# EAGLE board Extrudrboard2 (EAGLE 6.2)
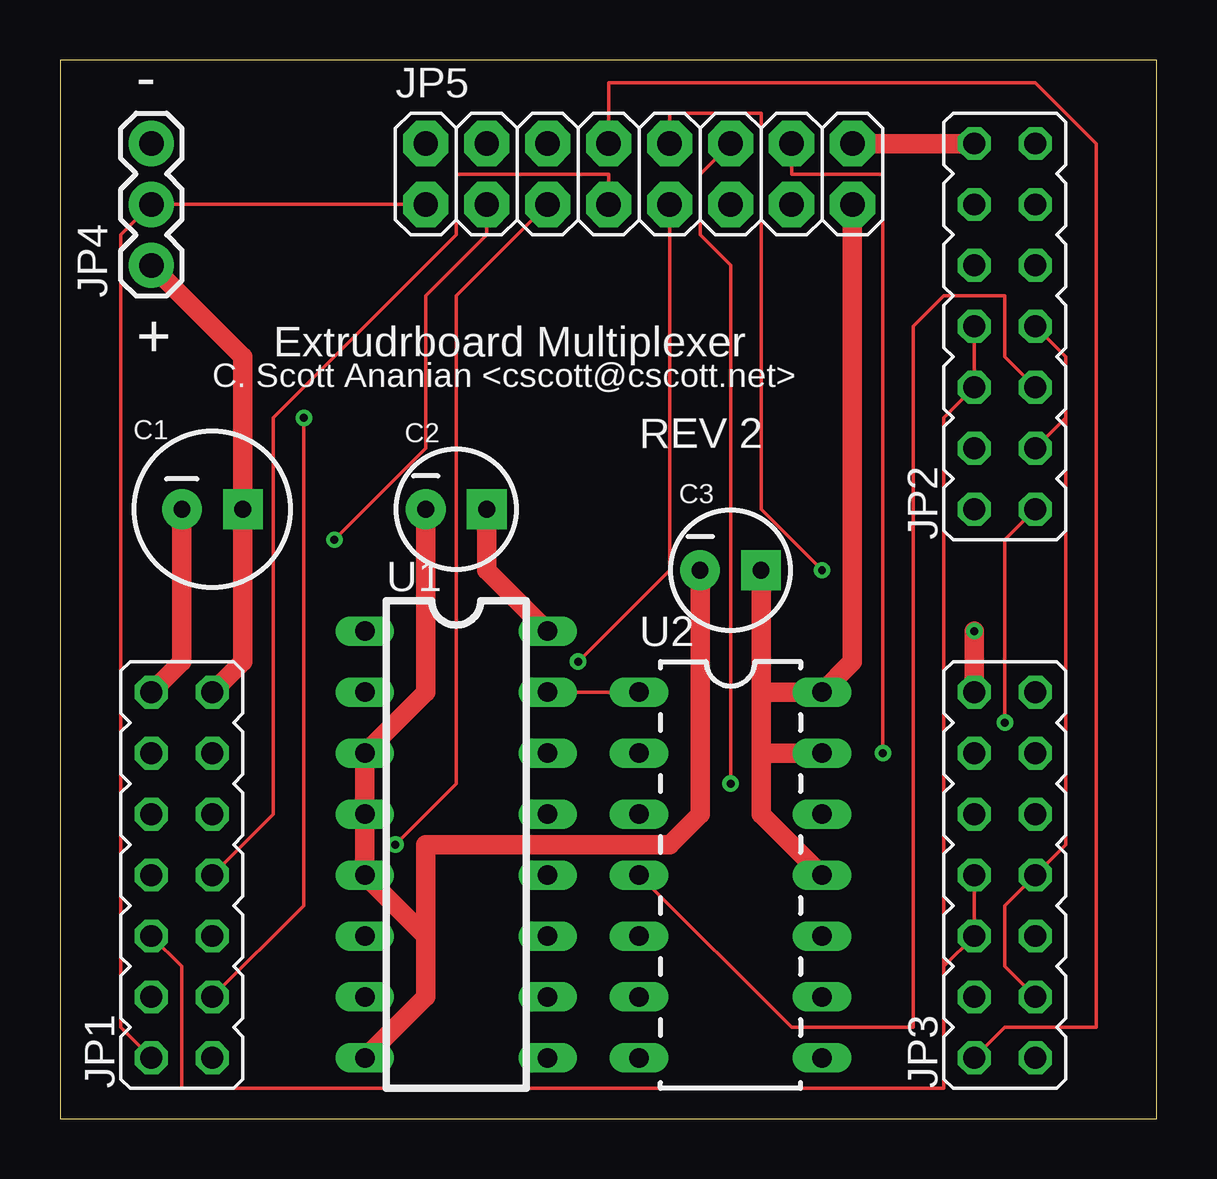
[diagram p0: board, top side]
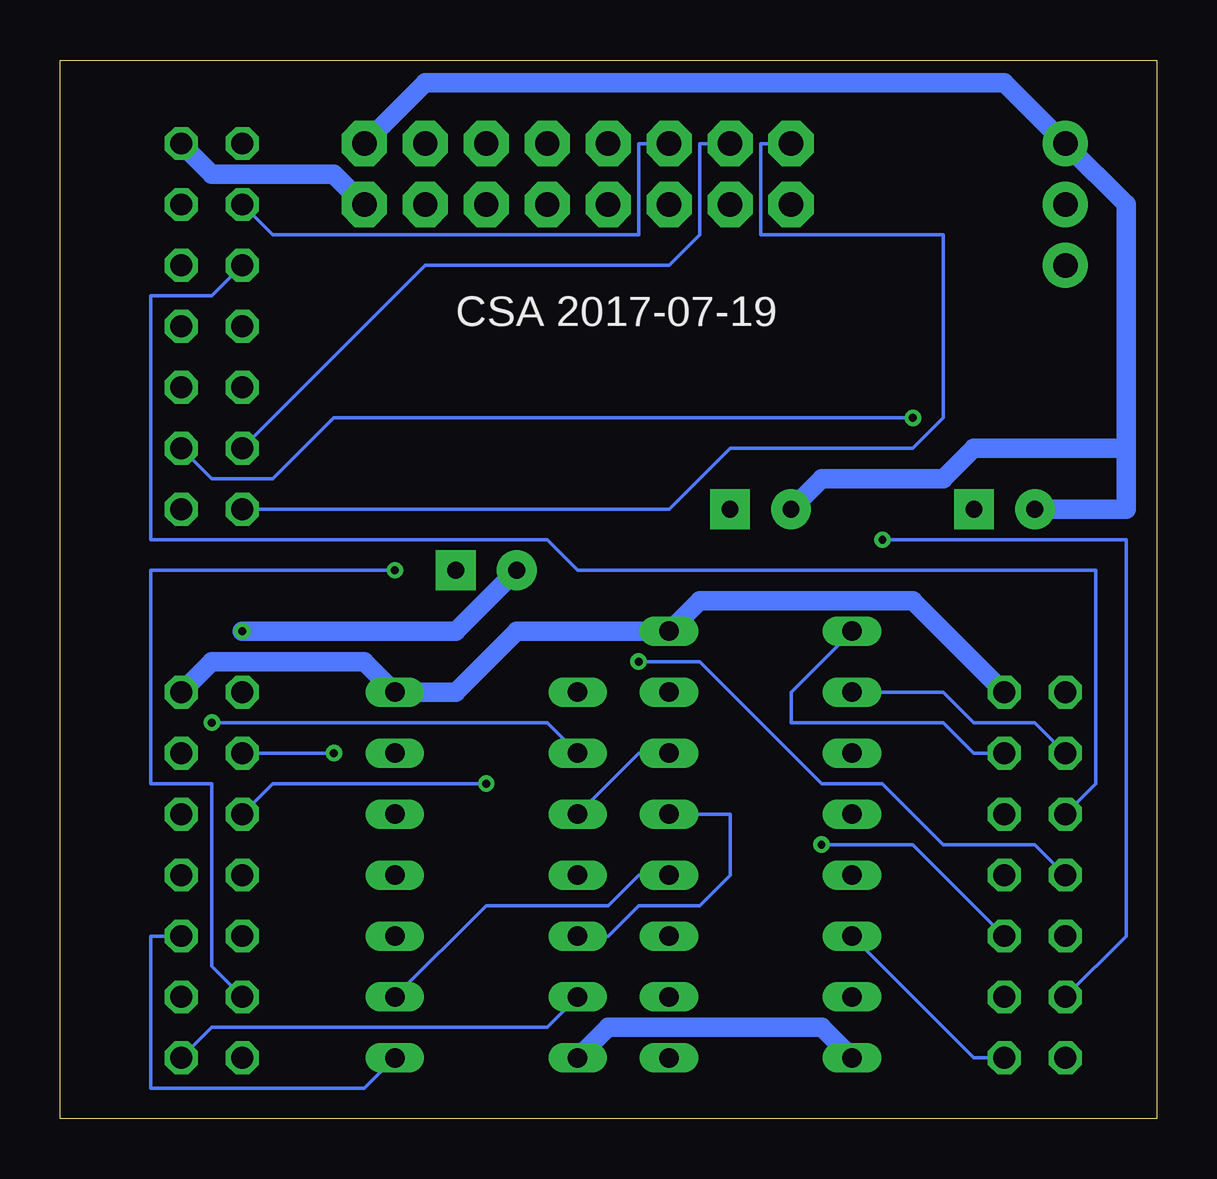
[diagram p1: board, bottom side, seen from below]

Size 45.7 x 44.12 mm. Coordinates in mm from the lower left corner, seen from the top.
Outline: 0,0 45.7,0 45.7,44.12 0,44.12 0,0
Copper layers (1*16): Top 0.0356mm / dielectric 1.5011mm / Bottom 0.0356mm
Design rules: minimum track width 6mil, minimum drill 13mil, track to track 6mil, track to pad 6mil, pad to pad 6mil, via to via 6mil, smd to smd 6mil, copper to edge 15mil, drill to drill 6mil, minimum pad ring 7mil, minimum via ring 7mil, stop-mask expansion 2.5mil, vias tented up to drill 0mil, thermal gap 10mil
Net classes: 1 Power: width 0.813 mm

## Footprints (pad centres in the part's own frame; a part is rotated, then mirrored left to right if it is on the bottom)
CPOL-RADIAL-100UF-25V = drill 0.7 pad 1.651 square: 1 1.27,0 | drill 0.7 pad 1.651: 2 -1.27,0
CPOL-RADIAL-10UF-25V = drill 0.7 pad 1.651 square: 1 1.27,0 | drill 0.7 pad 1.651: 2 -1.27,0
JP7Q = drill 0.914 octagon: 1 -7.62,-1.27; 2 -7.62,1.27; 3 -5.08,-1.27; 4 -5.08,1.27; 5 -2.54,-1.27; 6 -2.54,1.27; 7 0,-1.27; 8 0,1.27; 9 2.54,-1.27; 10 2.54,1.27; 11 5.08,-1.27; 12 5.08,1.27; 13 7.62,-1.27; 14 7.62,1.27
1X03 = drill 1.016 pad 1.88: 1 0,0; 2 2.54,0; 3 5.08,0
2X8 = drill 1.016 pad 1.88 octagon: 1 0,0; 2 0,2.54; 3 2.54,0; 4 2.54,2.54; 5 5.08,0; 6 5.08,2.54; 7 7.62,0; 8 7.62,2.54; 9 10.16,0; 10 10.16,2.54; 11 12.7,0; 12 12.7,2.54; 13 15.24,0; 14 15.24,2.54; 15 17.78,0; 16 17.78,2.54
DIL16 = drill 0.813 long: 1 -8.89,-3.81; 2 -6.35,-3.81; 3 -3.81,-3.81; 4 -1.27,-3.81; 5 1.27,-3.81; 6 3.81,-3.81; 7 6.35,-3.81; 8 8.89,-3.81; 9 8.89,3.81; 10 6.35,3.81; 11 3.81,3.81; 12 1.27,3.81; 13 -1.27,3.81; 14 -3.81,3.81; 15 -6.35,3.81; 16 -8.89,3.81
DIL14 = drill 0.813 long: 1 -8.89,-3.81; 2 -6.35,-3.81; 3 -3.81,-3.81; 4 -1.27,-3.81; 5 1.27,-3.81; 6 3.81,-3.81; 7 6.35,-3.81; 8 6.35,3.81; 9 3.81,3.81; 10 1.27,3.81; 11 -1.27,3.81; 12 -3.81,3.81; 13 -6.35,3.81; 14 -8.89,3.81

## Placement (x,y rotation side)
C1  22uF  [CPOL-RADIAL-100UF-25V]  6.35,25.4 0 top
C2  100nF  [CPOL-RADIAL-10UF-25V]  16.51,25.4 0 top
C3  100nF  [CPOL-RADIAL-10UF-25V]  27.94,22.86 0 top
JP1  Printrboard  [JP7Q]  5.08,10.16 90 top
JP2  Extrudrboard #1  [JP7Q]  39.37,33.02 90 top
JP3  Extrudrboard #2  [JP7Q]  39.37,10.16 90 top
JP4  FILWIDTH  [1X03]  3.81,35.56 90 top
JP5  Expansion  [2X8]  15.24,38.1 0 top
U1  SN74HC138N  [DIL16]  16.51,11.43 270 top
U2  SN74HC04  [DIL14]  27.94,8.89 270 top

## Library data of the parts
C1-C3 JP4 JP5 U1 U2 = SparkFun
JP1-JP3 = printrbot

## Nets
!A-STEP: U1.15 U2.1
!B-STEP: U1.14 U2.3
!C-STEP: U1.13 U2.5
!D-STEP: U1.12 U2.9
A3: JP1.4 JP5.3
A-STEP: JP2.1 U2.2
B-STEP: JP2.5 U2.4
C-STEP: JP3.1 U2.6
D-STEP: JP3.5 U2.8
E-DIR: JP1.3 JP2.3 JP2.7 JP3.3 JP3.7
E-ENABLE: JP1.6 JP2.6 JP2.8 JP3.6 JP3.8
E-STEP: JP1.1 U1.6
E_MUX0: JP1.11 U1.1
E_MUX1: JP1.12 U1.2
FAN2: JP1.10 JP2.10
FILWIDTH: JP1.2 JP4.2 JP5.1
GND [Power]: C1.2 C2.2 C3.2 JP1.14 JP2.14 JP3.14 JP4.3 JP5.16 U1.3 U1.4 U1.5 U1.8 U2.7
PD2: JP1.5 JP5.5
PD3: JP1.7 JP5.7
TMS: JP1.8 JP5.9
VCC [Power]: C1.1 C2.1 C3.1 JP1.13 JP2.13 JP3.13 JP4.1 JP5.15 U1.16 U2.11 U2.13 U2.14
X1_ATHERM: JP2.2 JP5.2
X1_BTHERM: JP2.4 JP5.4
X1_HOTENDB: JP2.12 JP5.6
X2_ATHERM: JP3.2 JP5.8
X2_BTHERM: JP3.4 JP5.10
X2_HOTENDA: JP3.10 JP5.12
X2_HOTENDB: JP3.12 JP5.14

## Tracks (layer width: path | path; a pad name or v marks a point on that pad's centre or on a via)
!A-STEP
  Top 0.152: U2.1 U1.15
!B-STEP
  Bottom 0.152: U2.3 21.59,15.24 U1.14
!C-STEP
  Bottom 0.152: U2.5 22.86,7.62 21.59,8.89 19.05,8.89 17.78,10.16 17.78,12.7 U1.13
!D-STEP
  Bottom 0.152: U1.12 21.59,10.16 22.86,8.89 27.94,8.89 U2.9
A3  (via drill 0.33)
  Top 0.152: v11.43,24.13 15.24,27.94 15.24,34.29 17.78,36.83 JP5.3
  Bottom 0.152: JP1.4 1.27,7.62 1.27,24.13 v11.43,24.13
A-STEP  (via drill 0.33)
  Top 0.152: v39.37,16.51 39.37,24.13 JP2.1
  Bottom 0.152: U2.2 25.4,16.51 v39.37,16.51
B-STEP
  Top 0.152: U2.4 30.48,3.81 35.56,3.81 35.56,33.02 36.83,34.29 39.37,34.29 39.37,31.75 JP2.5
C-STEP
  Bottom 0.152: U2.6 25.4,3.81 39.37,3.81 JP3.1
D-STEP
  Bottom 0.152: U2.8 33.02,1.27 41.91,1.27 41.91,7.62 JP3.5
E-DIR  (via drill 0.33)
  Top 0.152: JP3.3 39.37,6.35 39.37,8.89 JP3.7 41.91,11.43 41.91,29.21 | JP1.3 10.16,8.89 v10.16,29.21 | JP2.7 41.91,31.75 41.91,29.21 | JP2.3 41.91,29.21
  Bottom 0.152: v10.16,29.21 34.29,29.21 36.83,26.67 39.37,26.67 JP2.3
E-ENABLE
  Top 0.152: JP2.8 JP2.6 36.83,29.21 36.83,6.35 | JP1.6 5.08,6.35 5.08,1.27 36.83,1.27 36.83,6.35 | 36.83,6.35 JP3.6 JP3.8
E-STEP
  Bottom 0.152: U1.6 7.62,2.54 JP1.1
E_MUX0
  Bottom 0.152: U1.1 15.24,17.78 15.24,16.51 8.89,16.51 7.62,15.24 JP1.11
E_MUX1
  Bottom 0.152: U1.2 8.89,17.78 7.62,16.51 5.08,16.51 JP1.12
FAN2
  Bottom 0.152: JP1.10 2.54,13.97 2.54,22.86 24.13,22.86 25.4,24.13 41.91,24.13 41.91,34.29 39.37,34.29 JP2.10
FILWIDTH
  Top 0.152: JP1.2 2.54,3.81 2.54,36.83 JP4.2 JP5.1
GND  (via drill 0.33)
  Top 0.813: v38.1,20.32 JP3.14 | U1.8 15.24,5.08 15.24,7.62 | 15.24,7.62 U1.5 U1.4 U1.3 15.24,17.78 C2.2 | C3.2 26.67,12.7 25.4,11.43 15.24,11.43 15.24,7.62 | JP5.16 JP2.14 | JP1.14 5.08,19.05 C1.2
  Bottom 0.813: v38.1,20.32 29.21,20.32 C3.2 | U2.7 22.86,3.81 13.97,3.81 U1.8 | 1.27,27.94 1.27,25.4 C1.2 | 1.27,27.94 1.27,38.1 JP4.3 6.35,43.18 30.48,43.18 JP5.16 | C2.2 13.97,26.67 8.89,26.67 7.62,27.94 1.27,27.94
PD2  (via drill 0.33)
  Top 0.152: v13.97,11.43 16.51,13.97 16.51,34.29 JP5.5
  Bottom 0.152: JP1.5 10.16,11.43 v13.97,11.43
PD3
  Top 0.152: JP1.7 8.89,12.7 8.89,29.21 16.51,36.83 16.51,39.37 22.86,39.37 JP5.7
TMS  (via drill 0.33)
  Top 0.152: v21.59,19.05 25.4,22.86 JP5.9
  Bottom 0.152: JP1.8 5.08,11.43 8.89,11.43 11.43,13.97 13.97,13.97 19.05,19.05 v21.59,19.05
VCC
  Top 0.813: JP1.13 7.62,19.05 C1.1 7.62,31.75 JP4.1 | U1.16 17.78,22.86 C2.1 | U2.11 29.21,12.7 29.21,15.24 | C3.1 29.21,17.78 | 29.21,17.78 29.21,15.24 | 29.21,15.24 U2.13 | 29.21,17.78 U2.14 33.02,19.05 JP5.15
  Bottom 0.813: JP2.13 39.37,39.37 34.29,39.37 JP5.15 | JP3.13 39.37,19.05 33.02,19.05 U2.14 29.21,17.78 26.67,20.32 U1.16 19.05,21.59 10.16,21.59 JP1.13
X1_ATHERM
  Bottom 0.152: JP2.2 20.32,25.4 17.78,27.94 10.16,27.94 8.89,29.21 8.89,36.83 16.51,36.83 16.51,40.64 JP5.2
X1_BTHERM
  Bottom 0.152: JP2.4 30.48,35.56 20.32,35.56 19.05,36.83 19.05,40.64 JP5.4
X1_HOTENDB
  Bottom 0.152: JP2.12 36.83,36.83 21.59,36.83 21.59,40.64 JP5.6
X2_ATHERM
  Top 0.152: JP3.2 39.37,3.81 43.18,3.81 43.18,40.64 40.64,43.18 22.86,43.18 JP5.8
X2_BTHERM  (via drill 0.33)
  Top 0.152: v31.75,22.86 29.21,25.4 29.21,41.91 25.4,41.91 JP5.10
  Bottom 0.152: JP3.4 39.37,6.35 39.37,13.97 41.91,13.97 41.91,22.86 v31.75,22.86
X2_HOTENDA  (via drill 0.33)
  Top 0.152: v27.94,13.97 27.94,35.56 26.67,36.83 26.67,39.37 JP5.12
  Bottom 0.152: JP3.10 36.83,13.97 v27.94,13.97
X2_HOTENDB  (via drill 0.33)
  Top 0.152: v34.29,15.24 34.29,39.37 30.48,39.37 JP5.14
  Bottom 0.152: v34.29,15.24 JP3.12

## Text on the board
tNames: - | + | Extrudrboard Multiplexer | C. Scott Ananian <cscott@cscott.net> | REV 2
bNames: CSA 2017-07-19
tValues: 1